# Allegro board PCB_ESP32-P4_FUNCTION_EV_BOARD_MIPI_Camera_Sub_V1.1_20240529.brd
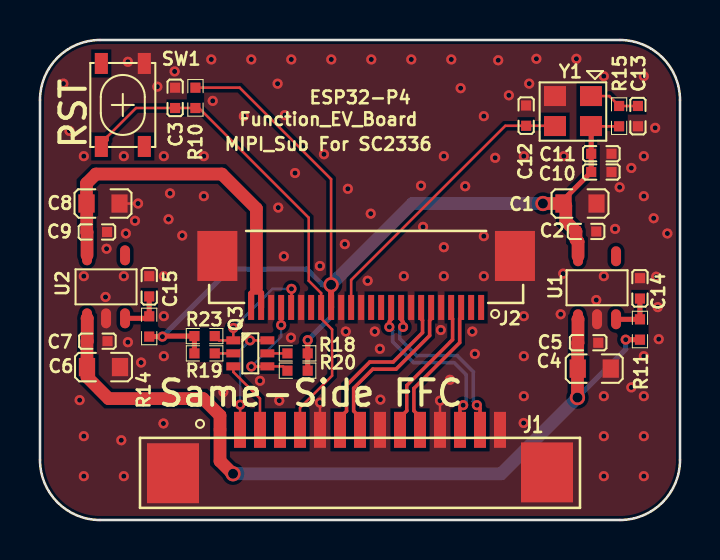
[diagram p0: board, top side]
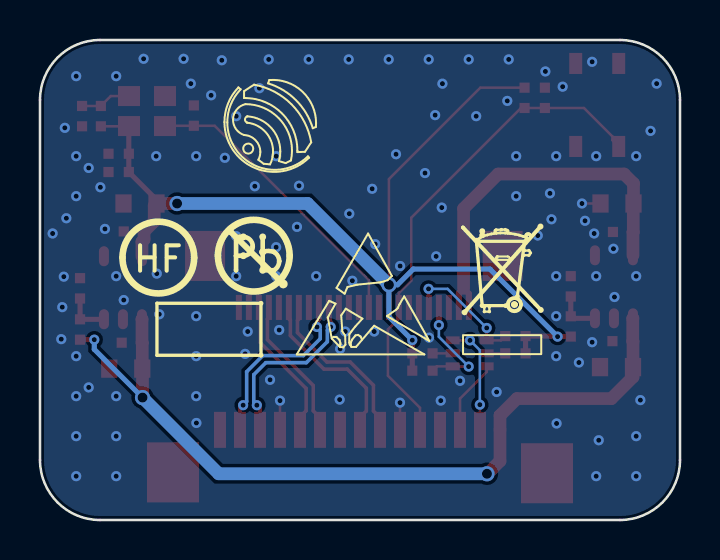
[diagram p1: board, bottom side, seen from below]

Outline 32 x 24 mm; copper layers: TOP, GND, POWER, BOTTOM. Coordinates in mm from the lower left corner of the outline.
Outline path: 0,21 0,3 arc(0.88,0.88) 3,0 29,0 arc(31.12,0.88) 32,3 32,21 arc(31.12,23.12) 29,24 3,24 arc(0.88,23.12) 0,21

## Design rules (mm)
net group CSI_A_CLK: nets CSI_CLKN CSI_CLKP
net group CSI_A_DATA0: nets CSI_DATA0N CSI_DATA0P
net group CSI_A_DATA1: nets CSI_DATA1N CSI_DATA1P

## Placement (name value [footprint] x y rotation side)
C1  10uF/6.3V(20%)  [C0603]  27 15.82 0 top
C2  0.1uF/50V(10%)  [C0402]  27.3 14.43 0 top
C3  1uF/25V(10%)  [C0402]  6.76 21.11 90 top
C4  10uF/6.3V(20%)  [C0603]  27.71 7.57 0 top
C5  0.1uF/50V(10%)  [C0402]  27.41 8.86 0 top
C6  10uF/6.3V(20%)  [C0603]  3.17 7.65 0 top
C7  0.1uF/50V(10%)  [C0402]  2.87 8.94 0 top
C8  10uF/6.3V(20%)  [C0603]  3.15 15.82 0 top
C9  0.1uF/50V(10%)  [C0402]  2.84 14.4 0 top
C10  1nF/50V(10%)  [C0402]  28.07 17.4 0 top
C11  0.1uF/50V(10%)  [C0402]  28.07 18.31 0 top
C12  15pF/50V(10%)(NC)  [C0402]  24.31 20.22 90 top
C13  1uF/25V(10%)(NC)  [C0402]  29.9 20.19 270 top
C14  0.1uF/50V(10%)(NC)  [C0402]  30 11.58 90 top
C15  0.1uF/50V(10%)  [C0402]  5.46 11.68 90 top
J1  FPC_15P_R  [FFC_15P_1_MIPI_R]  16 3.61 0 top
J2  FPC_24P  [FFC_24P_0P5]  16.31 11.25 180 top
NOREF  -  []  0 24 0 top
NOREF#2  -  []  0 0 90 top
Q3  DUAL_NMOS  [SOT-363]  10.52 8.33 0 top
R10  10K(1%)  [R0402]  7.77 21.11 90 top
R11  10K(1%)  [R0402]  30 9.53 270 top
R14  10K(1%)  [R0402]  5.46 9.68 270 top
R15  10K(1%)  [R0402]  28.96 20.19 270 top
R18  10K(1%)  [R0402]  12.88 8.33 180 top
R19  10K(1%)  [R0402]  8.23 8.33 180 top
R20  2.2K(1%)  [R0402]  12.88 7.47 180 top
R23  2.2K(1%)  [R0402]  8.23 9.19 0 top
SW1  NTC013-AT1J-A160T  [SW4-4P2X3P2X2P5-SMT]  4.14 20.75 270 top
U1  ME6211C18M5G-N  [SOT23-5]  27.85 11.61 90 top
U2  ME6211C28M5G-N  [SOT23-5]  3.3 11.66 90 top
Y1  24MHz  [XTAL3225]  26.65 20.45 180 top

## Library data of the parts
C1 C4 C6 C8 = CAPACITOR: signal model: DEFAULT_CAPACITOR_1e+07pF_1_2
C2 C3 C5 C9-C15 = CAPACITOR: signal model: DEFAULT_CAPACITOR_100000pF_1_2
C7 = CAPACITOR
J1 = FPC_15P_R
J2 = FPC_24P
Q3 = DUAL_NMOS
R10 R11 R14 R15 R18-R20 R23 = RESISTOR
SW1 = SW_SP_4P
U1 U2 = LDO_SOT23-5_3
Y1 = OSC_0

## Footprints (pads in the part's own frame, mm; a bottom-side part is the same pattern mirrored in y, then rotated)
C0402
  rect 0.508x0.508 smd: 1(-0.508,0) 2(0.508,0)
C0603
  rect 0.813x0.914 smd: 1(-0.826,0) 2(0.826,0)
FFC_15P_1_MIPI_R
  rect 0.6x1.8 smd: 1(-7,0.9) 2(-6,0.9) 3(-5,0.9) 4(-4,0.9) 5(-3,0.9) 6(-2,0.9) 7(-1,0.9) 8(0,0.9) 9(1,0.9) 10(2,0.9) 11(3,0.9) 12(4,0.9) 13(5,0.9) 14(6,0.9) 15(7,0.9)
  rect 2.6x3 smd: 16(-9.35,-1.27) 17(9.35,-1.227)
FFC_24P_0P5
  rect 0.3x1.25 smd: 1(-5.75,0.625) 2(-5.25,0.625) 3(-4.75,0.625) 4(-4.25,0.625) 5(-3.75,0.625) 6(-3.25,0.625) 7(-2.75,0.625) 8(-2.25,0.625) 9(-1.75,0.625) 10(-1.25,0.625) 11(-0.75,0.625) 12(-0.25,0.625) 13(0.25,0.625) 14(0.75,0.625) 15(1.25,0.625) 16(1.75,0.625) 17(2.25,0.625) 18(2.75,0.625) 19(3.25,0.625) 20(3.75,0.625) 21(4.25,0.625) 22(4.75,0.625) 23(5.25,0.625) 24(5.75,0.625)
  rect 2x2.5 smd: 25(-7.44,-1.95) 26(7.44,-1.95)
R0402
  rect 0.508x0.508 smd: 1(-0.508,0) 2(0.508,0)
SOT23-5
  oval 1x0.5 smd: 1(-1.575,0.95) 2(-1.575,0) 3(-1.575,-0.95) 4(1.575,-0.95) 5(1.575,0.95)
SOT-363
  rect 0.7x0.4 smd: 1(-0.85,0.65) 2(-0.85,0) 3(-0.85,-0.65) 4(0.85,-0.65) 5(0.85,0) 6(0.85,0.65)
SW4-4P2X3P2X2P5-SMT
  rect 1.05x0.65 smd: 1(-2.075,1.075) 2(-2.075,-1.075) 3(2.075,-1.075) 4(2.075,1.075)
XTAL3225
  rect 1.1x1 smd: 1(-0.9,-0.75) 2(0.9,-0.75) 3(0.9,0.75) 4(-0.9,0.75)

## Nets
3V3: C4.1 C5.1 C6.1 C7.1 J1.1 R11.2 U1.1(VIN) U2.1(VIN)
AVDD_2V8: C8.1 C9.1 J2.23 J2.24 U2.5(OUT)
GND: C1.2 C2.2 C3.2 C4.2 C5.2 C6.2 C7.2 C8.2 C9.2 C10.2 C11.2 C12.2 C13.2 C14.2 C15.2 J1.6 J1.9 J1.12 J1.15 J1.16 J1.17 J2.5 J2.8 J2.13 J2.15 J2.19 J2.22 J2.25 J2.26 SW1.1 U1.2(GND) U2.2(GND) Y1.2(GND)
CSI_CLKN: J1.8 J2.6
CSI_CLKP: J1.7 J2.7
CSI_DATA0N: J1.14 J2.9
CSI_DATA0P: J1.13 J2.10
CSI_DATA1N: J1.11 J2.3
CSI_DATA1P: J1.10 J2.4
DOVDD_1V8: C1.1 C2.1 C10.1 C11.1 J2.16 R10.2 R14.2 R15.2 R18.1 R19.2 R20.1 R23.1 U1.5(OUT) Y1.4(VCC)
ESP_I2C_SCL: J1.3 Q3.3(2D)
ESP_I2C_SDA: J1.2 Q3.6(1D)
RESET: C3.1 J1.5 J2.17 R10.1 SW1.3
SENSOR_SCL: J2.21 Q3.4(2S) R20.2
SENSOR_SDA: J2.20 Q3.1(1S) R23.2
XVCLK: C12.1 J2.14 Y1.3(OUT)
N18551010: C14.1 R11.1 U1.3(EN)
N18551320: C15.1 R14.1 U2.3(EN)
N18553012: C13.1 R15.1 Y1.1(EN)
N18567472: Q3.2(1G) R19.1
N18567474: Q3.5(2G) R18.2

Pads without a net: J1 4; J2 1 2 11 12 18; SW1 2 4; U1 4; U2 4

## Via types
v1: diameter 0.508, hole 0.254, TOP to BOTTOM, 126 vias
v2: diameter 0.762, hole 0.5, TOP to BOTTOM, 4 vias

## Routing (per net, layer and track width the routed paths; a pad name or vN(x,y) marks a point on that pad's centre or on a via; arc(x,y) is an arc through that point)
3V3: length 40.9
  TOP w0.254: R11.2 v1(29.29,9.02)
  TOP w0.635: U2.1 2.36,10.07 C7.1 2.35,8.93 C6.1 2.35,7.15 3.43,6.07 8.15,6.07 9,5.22 J1.1 9,2.95 9.63,2.31 v2(9.65,2.31) ; v2(26.87,6.12) 26.87,7.56 C4.1 26.89,8.85 C5.1 26.9,10.03 U1.1
  BOTTOM w0.254: v1(29.29,9.02) 29.29,8.53 v2(26.87,6.12)
  BOTTOM w0.635: v2(9.65,2.31) 23.06,2.31 v2(26.87,6.12)
AVDD_2V8: length 19.1
  TOP w0.3: J2.24 10.56,11.32 10.82,11.58 11.06,11.35 J2.23
  TOP w0.635: U2.5 2.35,14.39 C9.1 2.34,15.81 C8.1 2.32,16.83 2.79,17.3 9.09,17.3 10.82,15.57 10.82,11.58
GND: length 3.7
  TOP w0.127: v1(20,5.97) J1.12 ; v1(14,5.87) J1.6 ; v1(4.9,15.82) C8.2
  vias: v1(1.17,21.82) v1(1.47,19.46) v1(1.98,5.99) v1(2.19,18.19) v1(2.19,12.19) v1(2.19,4.19) v1(2.19,2.19) v1(3.33,13.56) v1(3.28,11.15) v1(4.06,3.99) v1(4.19,18.19) v1(4.19,12.19) v1(4.19,2.19) v1(4.29,14.33) v1(4.39,22.91) v1(4.39,8.89) v1(4.75,14.96) v1(5.05,7.87) v1(5.87,21.67) v1(6.19,18.19) v1(6.19,12.19) v1(6.19,10.19) v1(6.19,8.19) v1(6.17,4.83) v1(6.43,15.04) v1(6.5,16.33) v1(6.73,22.43) v1(7.11,14.22) v1(8.19,18.19) v1(8.19,16.19) v1(8.56,23.03) v1(8.64,20.95) v1(9.17,6.4) v1(10.19,20.19) v1(10.56,23.03) v1(11,6.96) v1(11.88,21.82) v1(11.91,15.62) v1(11.96,5.97) v1(12.24,20.24) v1(12.19,13.18) v1(12.55,9.12) v1(12.56,23.03) v1(12.75,17.35) v1(14,12.7) v1(14.2,18.29) v1(14.56,23.03) v1(15.24,13.79) v1(15.29,9.42) v1(15.39,16.56) v1(16.38,11.96) v1(16.54,15.32) v1(16.56,23.03) v1(16.74,9.42) v1(16.99,8.56) v1(17.02,6.02) v1(18.19,12.19) v1(18.56,23.03) v1(19.05,16.71) v1(19.15,14.66) v1(20.04,9.5) v1(20.19,18.19) v1(20.19,13.64) v1(20.19,12.19) v1(20.5,7.01) v1(20.56,23.03) v1(21.03,21.59) v1(21.26,16.69) v1(21.62,9.42) v1(21.74,8.31) v1(22.19,20.19) v1(22.19,14.19) v1(22.19,12.19) v1(22.76,18.11) v1(22.91,22.99) v1(23.44,21.23) v1(24.19,18.19) v1(24.19,10.19) v1(24.19,8.19) v1(24.19,6.19) v1(24.18,4.85) v1(24.46,21.82) v1(24.82,23.06) v1(26.04,10.29) v1(26.19,18.19) v1(26.16,12.32) v1(26.82,23.06) v1(27.81,11) v1(28.19,22.19) v1(28.19,12.19) v1(28.19,6.19) v1(28.19,4.19) v1(28.19,2.19) v1(28.75,14.55) v1(28.98,16.64) v1(29.57,17.6) v1(29.57,6.63) v1(30.19,22.19) v1(30.19,18.19) v1(30.19,16.19) v1(30.19,8.19) v1(30.19,6.19) v1(30.19,4.19) v1(30.19,2.19) v1(30.68,15.09) v1(30.76,19.61) v1(30.81,12.17) v1(30.89,10.64) v1(30.94,9.04) v1(31.37,14.33)
CSI_CLKN: length 8.5
  TOP w0.178: J1.8 16,5.13 15.68,5.45 15.68,6.59 16.64,7.54 17.81,7.54 19.48,9.22 19.48,9.98 19.56,10.06 J2.6
CSI_CLKP: length 8.5
  TOP w0.178: J1.7 15,5.12 15.33,5.45 15.33,6.74 16.49,7.9 17.66,7.9 19.13,9.37 19.13,9.98 19.06,10.05 J2.7
CSI_DATA0N: length 9.1
  TOP w0.178: v1(18.15,9.65) 18.15,9.91 18.06,10.01 J2.9 ; v1(21.84,5.74) 22,5.58 J1.14
  BOTTOM w0.178: v1(21.84,5.74) 21.67,5.92 21.67,7.41 20.86,8.22 18.83,8.22 17.99,9.06 17.99,9.49 v1(18.15,9.65)
CSI_DATA0P: length 9.1
  TOP w0.178: J2.10 17.56,10.02 17.47,9.93 v1(17.47,9.65) ; J1.13 21,5.58 v1(21.16,5.74)
  BOTTOM w0.178: v1(17.47,9.65) 17.63,9.49 17.63,8.92 18.68,7.87 20.71,7.87 21.31,7.26 21.31,5.89 v1(21.16,5.74)
CSI_DATA1N: length 7.2
  TOP w0.178: J1.11 19,5.16 18.69,5.46 18.69,6.58 20.98,8.87 20.98,10.06 21.06,10.13 J2.3
CSI_DATA1P: length 7.2
  TOP w0.178: J1.10 18,5.12 18.34,5.46 18.34,6.73 20.63,9.02 20.63,10.05 20.56,10.13 J2.4
DOVDD_1V8: length 55.3
  TOP w0.127: v2(14.55,11.76) 14.55,17.04 9.98,21.62 R10.2 ; 27.56,19.69 27.56,19.68 28.96,19.68
  TOP w0.254: Y1.4 27.56,19.69 C11.1 C10.1 26.17,16.01 C1.1 ; R20.1 R18.1 v1(13.39,8.99) ; R19.2 R23.1 6.15,9.19 v1(6.12,9.17) R14.2
  TOP w0.3: J2.16 14.55,10.63 v2(14.55,11.76)
  TOP w0.635: U1.5 26.9,13.92 26.8,14.02 C2.1 26.29,14.94 26.29,15.71 C1.1 v2(25.15,15.82)
  BOTTOM w0.254: v1(13.39,8.99) 14.55,10.16 v2(14.55,11.76) 14.12,11.76 13.34,12.55 9.5,12.55 v1(6.12,9.17)
  BOTTOM w0.635: v2(25.15,15.82) 18.62,15.82 v2(14.55,11.76)
ESP_I2C_SCL: length 3.7
  TOP w0.127: J1.3 11,4.51 11,6.07 9.67,7.4 Q3.3
ESP_I2C_SDA: length 5.5
  TOP w0.127: J1.2 10.01,4.51 v1(10.01,5.77) ; Q3.6 v1(10.5,8.98)
  BOTTOM w0.127: v1(10.01,5.77) 10.01,8.49 v1(10.5,8.98)
RESET: length 25.3
  TOP w0.127: J1.5 13,5.61 14.61,7.21 14.61,9.53 14.06,10.07 J2.17 14.06,11.34 13.44,11.96 13.44,15.11 7.95,20.6 R10.1 C3.1 4.8,20.6 3.38,19.18 3.38,18.99 SW1.3
SENSOR_SCL: length 5.5
  TOP w0.127: v1(10.57,7.67) 11.36,7.67 Q3.4 12.16,7.68 R20.2 ; J2.21 v1(12.06,9.75)
  BOTTOM w0.127: v1(12.06,9.75) 12.06,9.16 v1(10.57,7.67)
SENSOR_SDA: length 6.3
  TOP w0.127: v1(12.57,11.56) 12.57,10.64 J2.20 ; R23.2 8.95,8.98 Q3.1 v1(9.67,9.6)
  BOTTOM w0.127: v1(12.57,11.56) 11.62,11.56 v1(9.67,9.6)
XVCLK: length 14.8
  TOP w0.127: J2.14 15.56,12 23.27,19.71 C12.1 25.74,19.71 Y1.3
N18551010: length 2.2
  TOP w0.254: C14.1 30,10.03 28.81,10.03 U1.3
N18551320: length 2.2
  TOP w0.254: C15.1 R14.1 5.36,10.08 U2.3
N18553012: length 2.6
  TOP w0.127: C13.1 R15.1 28.46,21.2 Y1.1
N18567472: length 0.9
  TOP w0.127: Q3.2 R19.1
N18567474: length 1
  TOP w0.127: R18.2 Q3.5

## Copper pours and planes (outline as drawn; the poured copper is in the pictures)
GND on TOP, BOTTOM, GND, POWER: 3,0.2 1.02,1.02 0.2,3 0.2,21 1.02,22.98 3,23.8 29,23.8 30.98,22.98 31.8,21 31.8,3 30.98,1.02 29,0.2

## Text on the board
Ref Des/Silkscreen Bottom: HF
Ref Des/Silkscreen Top: MIPI_Sub For SC2336 | Function_EV_Board | ESP32-P4 | Same-Side FFC | RST
User.5: FIGURE | SIZE | 0.254 | 0.5 | DRILL CHART: TOP to BOTTOM | ALL UNITS ARE IN MILLIMETERS | PLATED | QTY | 126 | 4
